# EAGLE board SmoothieBrainz - next round (EAGLE 6.4), part 1 of 2
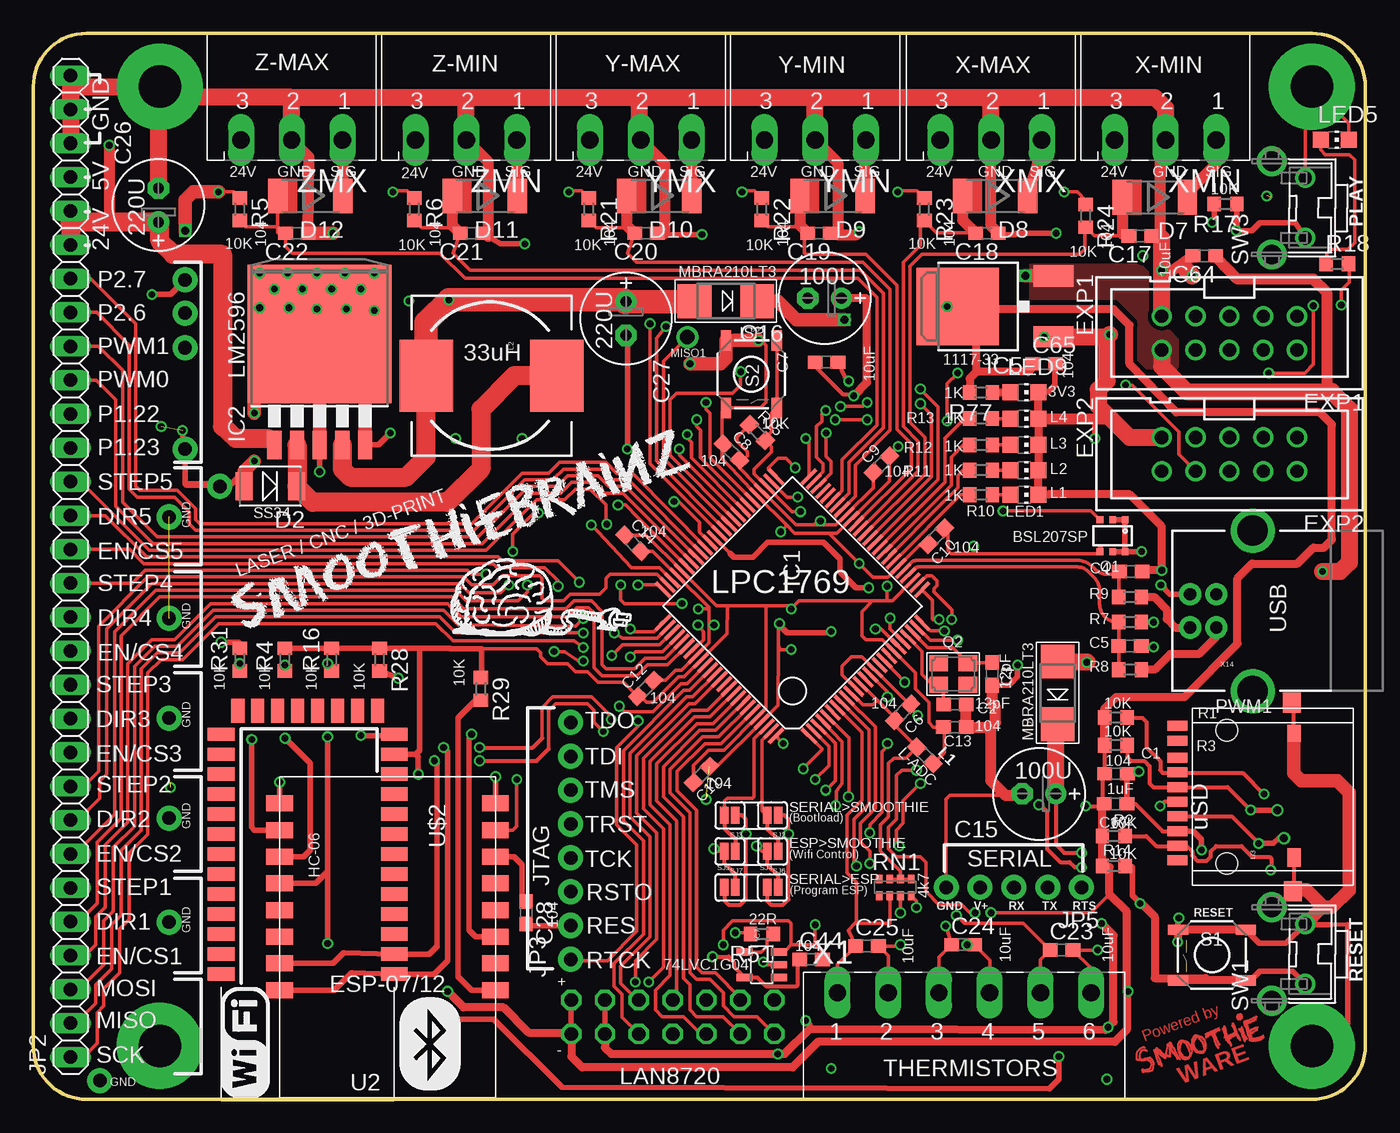
[diagram p0: board, top side]
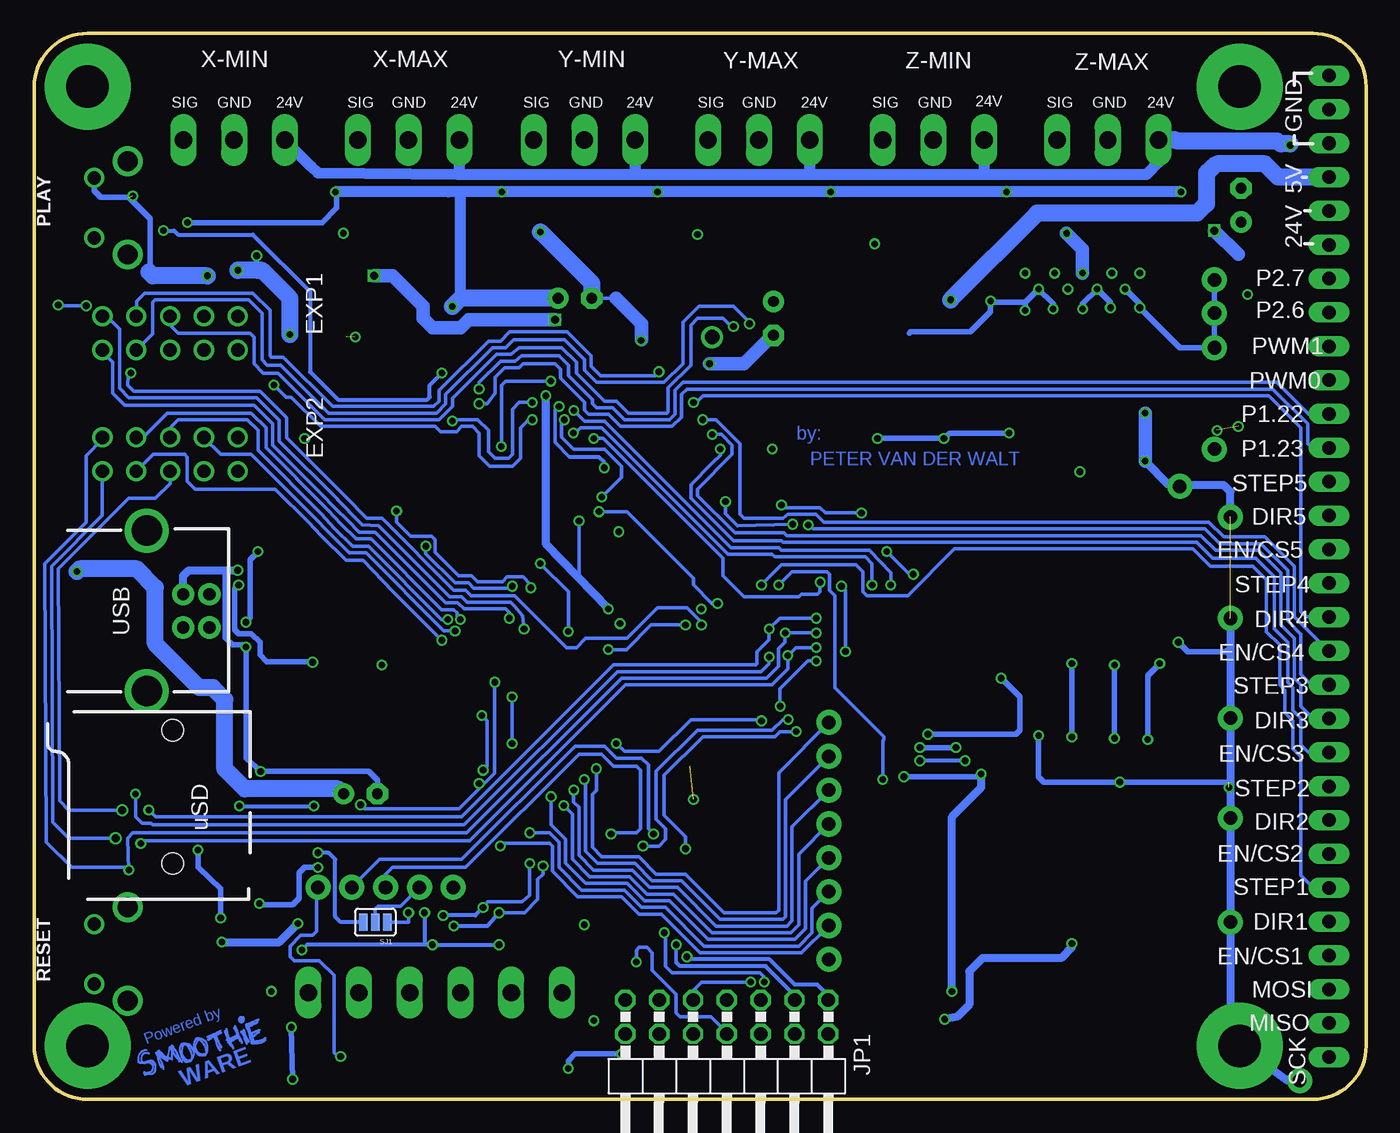
[diagram p1: board, bottom side, seen from below]

Size 100 x 80 mm. Coordinates in mm from the lower left corner, seen from the top.
Outline: 4,0 96,0 arc90 100,4 100,76 arc90 96,80 4,80 arc90 0,76 0,4 arc90 4,0
Copper layers (1*16): Top 0.035mm / dielectric 1.5mm / Bottom 0.035mm
Design rules "dirt_cheap_dirty_boards.v1": minimum track width 5mil, minimum drill 12mil, track to track 5mil, track to pad 5mil, pad to pad 5mil, via to via 5mil, smd to smd 0mil, copper to edge 10mil, drill to drill 10mil, minimum pad ring 10mil, minimum via ring 6mil, stop-mask expansion 2mil, vias tented up to drill 25mil, thermal gap 10mil
Net classes: 1 power: width 0.6 mm, clearance 0.305 mm
tRestrict: area 12.9,0.3 to 35.1,7.5
bRestrict: area 12.9,0.3 to 35.1,7.5

## Footprints (pad centres in the part's own frame; a part is rotated, then mirrored left to right if it is on the bottom)
C0603 = smd 1.1 x 1: 1 -0.85,0; 2 0.85,0
E2,5-7 = drill 0.813 pad 1.6: + -1.27,0 | drill 0.813 pad 1.6 octagon: - 1.27,0
SMADIODE = smd 2.54 x 2.54: A 2.349,0; C -2.349,0
DO-214AC = smd 1.27 x 2.1: 1 -1.98,0; 2 1.98,0
SOD87 = smd 1.45 x 2.6: 1 -2.445,0; 2 2.445,0
PAK100/2500-10 = drill 1 pad 1.422: 1 -5.08,-1.27; 2 -5.08,1.27; 3 -2.54,-1.27; 4 -2.54,1.27; 5 0,-1.27; 6 0,1.27; 7 2.54,-1.27; 8 2.54,1.27; 9 5.08,-1.27; 10 5.08,1.27
LQFP100 = smd 0.27 x 1.5: 1 -6,-7.75; 2 -5.5,-7.75; 3 -5,-7.75; 4 -4.5,-7.75; 5 -4,-7.75; 6 -3.5,-7.75; 7 -3,-7.75; 8 -2.5,-7.75; 9 -2,-7.75; 10 -1.5,-7.75; 11 -1,-7.75; 12 -0.5,-7.75; 13 0,-7.75; 14 0.5,-7.75; 15 1,-7.75; 16 1.5,-7.75; 17 2,-7.75; 18 2.5,-7.75; 19 3,-7.75; 20 3.5,-7.75; 21 4,-7.75; 22 4.5,-7.75; 23 5,-7.75; 24 5.5,-7.75; 25 6,-7.75; 51 6,7.75; 52 5.5,7.75; 53 5,7.75; 54 4.5,7.75; 55 4,7.75; 56 3.5,7.75; 57 3,7.75; 58 2.5,7.75; 59 2,7.75; 60 1.5,7.75; 61 1,7.75; 62 0.5,7.75; 63 0,7.75; 64 -0.5,7.75; 65 -1,7.75; 66 -1.5,7.75; 67 -2,7.75; 68 -2.5,7.75; 69 -3,7.75; 70 -3.5,7.75; 71 -4,7.75; 72 -4.5,7.75; 73 -5,7.75; 74 -5.5,7.75; 75 -6,7.75 | smd 1.5 x 0.27: 26 7.75,-6; 27 7.75,-5.5; 28 7.75,-5; 29 7.75,-4.5; 30 7.75,-4; 31 7.75,-3.5; 32 7.75,-3; 33 7.75,-2.5; 34 7.75,-2; 35 7.75,-1.5; 36 7.75,-1; 37 7.75,-0.5; 38 7.75,0; 39 7.75,0.5; 40 7.75,1; 41 7.75,1.5; 42 7.75,2; 43 7.75,2.5; 44 7.75,3; 45 7.75,3.5; 46 7.75,4; 47 7.75,4.5; 48 7.75,5; 49 7.75,5.5; 50 7.75,6; 76 -7.75,6; 77 -7.75,5.5; 78 -7.75,5; 79 -7.75,4.5; 80 -7.75,4; 81 -7.75,3.5; 82 -7.75,3; 83 -7.75,2.5; 84 -7.75,2; 85 -7.75,1.5; 86 -7.75,1; 87 -7.75,0.5; 88 -7.75,0; 89 -7.75,-0.5; 90 -7.75,-1; 91 -7.75,-1.5; 92 -7.75,-2; 93 -7.75,-2.5; 94 -7.75,-3; 95 -7.75,-3.5; 96 -7.75,-4; 97 -7.75,-4.5; 98 -7.75,-5; 99 -7.75,-5.5; 100 -7.75,-6
TO263-5 = smd 1.067 x 2.159: 1 -3.404,-5.791; 2 -1.702,-5.791; 3 0,-5.791; 4 1.702,-5.791; 5 3.404,-5.791 | smd 10.8 x 10.41: 6 0,2.54
DPACK = smd 1.6 x 3: 1 -2.28,-4.8; 3 2.28,-4.8 | smd 5.8 x 6.2: 4 0,2.38
SOT23-5 = smd 0.55 x 1.2: 1 -0.95,-1.3; 2 0,-1.3; 3 0.95,-1.3; 4 0.95,1.3; 5 -0.95,1.3
2X07/90 = drill 1.016 octagon: 1 -7.62,-6.35; 2 -7.62,-3.81; 3 -5.08,-6.35; 4 -5.08,-3.81; 5 -2.54,-6.35; 6 -2.54,-3.81; 7 0,-6.35; 8 0,-3.81; 9 2.54,-6.35; 10 2.54,-3.81; 11 5.08,-6.35; 12 5.08,-3.81; 13 7.62,-6.35; 14 7.62,-3.81
1X30 = drill 1.016 long: 1 -36.83,0; 2 -34.29,0; 3 -31.75,0; 4 -29.21,0; 5 -26.67,0; 6 -24.13,0; 7 -21.59,0; 8 -19.05,0; 9 -16.51,0; 10 -13.97,0; 11 -11.43,0; 12 -8.89,0; 13 -6.35,0; 14 -3.81,0; 15 -1.27,0; 16 1.27,0; 17 3.81,0; 18 6.35,0; 19 8.89,0; 20 11.43,0; 21 13.97,0; 22 16.51,0; 23 19.05,0; 24 21.59,0; 25 24.13,0; 26 26.67,0; 27 29.21,0; 28 31.75,0; 29 34.29,0; 30 36.83,0
1X08_NO_SILK = drill 1.016 pad 1.88: 1 0,0; 2 2.54,0; 3 5.08,0; 4 7.62,0; 5 10.16,0; 6 12.7,0; 7 15.24,0; 8 17.78,0
1X05_NO_SILK = drill 1.016 pad 1.88: 1 0,0; 2 2.54,0; 3 5.08,0; 4 7.62,0; 5 10.16,0
1X01NS-KIT = drill 1.016 pad 1.88: 1 0,0
0603 = smd 1.1 x 1: 1 -0.85,0; 2 0.85,0
CDRH125 = smd 5.4 x 4: 1 0,4.9; 2 0,-4.9
CHIP-LED0805 = smd 1.2 x 1.2: A 0,-1.05; C 0,1.05
SC74_INFINEON = smd 0.5 x 0.5: 1 -0.95,-1.2; 2 0,-1.2; 3 0.95,-1.2; 4 0.95,1.2; 5 0,1.2; 6 -0.95,1.2
CRYSTAL_3.2X2.5 = smd 1.4 x 1.2: 1 -1.1,-0.8; 2 1.1,0.8; GND1 -1.1,0.8; GND2 1.1,-0.8
R0603 = smd 1 x 1.1: 1 -0.85,0; 2 0.85,0
0603-ARV = smd 0.5 x 0.65: 1 -1.2,-0.625; 2 -0.4,-0.625; 3 0.4,-0.625; 4 1.2,-0.625; 5 1.2,0.625; 6 0.4,0.625; 7 -0.4,0.625; 8 -1.2,0.625
TACTILE_SWITCH_SMD = smd 1.524 x 0.762: 1 -2.54,1.905; 2 2.54,1.905; 3 -2.54,-1.905; 4 2.54,-1.905
SJ_3 = smd 0.635 x 1.27: 1 -0.889,0; 2 0,0; 3 0.889,0
SJ_2S = smd 0.635 x 1.27: 1 -0.412,0; 2 0.412,0
SW_TACT_STANDARD_RIGHT_ANGLE = drill 1: 1 -2.25,0; 2 2.25,0 | drill 1.5: 3 -3.5,2.5; 4 3.5,2.5
BLUETOOTH_SMD = smd 2 x 1: 1 0,0; 2 0,-1.5; 3 0,-3; 4 0,-4.5; 5 0,-6; 6 0,-7.5; 7 0,-9; 8 0,-10.5; 9 0,-12; 10 0,-13.5; 11 0,-15; 12 0,-16.5; 13 0,-18; 22 13,-18; 23 13,-16.5; 24 13,-15; 25 13,-13.5; 26 13,-12; 27 13,-10.5; 28 13,-9; 29 13,-7.5; 30 13,-6; 31 13,-4.5; 32 13,-3; 33 13,-1.5; 34 13,0 | smd 1 x 1.8: 14 1.25,-19.75; 15 2.75,-19.75; 16 4.25,-19.75; 17 5.75,-19.75; 18 7.25,-19.75; 19 8.75,-19.75; 20 10.25,-19.75; 21 11.75,-19.75
USD-SOCKET-PP = smd 0.75 x 1.5: 1 2.925,1.125; 2 1.825,1.125; 3 0.725,1.125; 4 -0.375,1.125; 5 -1.475,1.125; 6 -2.575,1.125; 7 -3.675,1.125; 8 -4.775,1.125; CD1 5.325,1.125; CD2 4.225,1.125 | smd 1.4 x 1: CDNC1 -4.55,-7.65 | smd 1.3 x 1: CDNC2 4.775,-7.65 | smd 1.5 x 1.35: GND1 -7.075,-7.55; GND2 7.075,-7.5 | hole 1.6: -5,-2.6; 5,-2.6
ESP8266-ESP12 = smd 2 x 1.2: 1 16.2,2; 2 16.2,4; 3 16.2,6; 4 16.2,8; 5 16.2,10; 6 16.2,12; 7 16.2,14; 8 16.2,16; 9 0,16; 10 0,14; 11 0,12; 12 0,10; 13 0,8; 14 0,6; 15 0,4; 16 0,2
MC1.5/6-G-3.81 = drill 1.3 long: 1 -9.525,8; 2 -5.715,8; 3 -1.905,8; 4 1.905,8; 5 5.715,8; 6 9.525,8
USB-B-PTH = drill 0.914 pad 1.676: D+ 0,1.25; D- 1.981,1.25; GND 0,-1.25; VBUS 1.981,-1.25 | drill 2.286: S1 -2.718,-6.02; S2 -2.718,6.02
MC1.5/3-G-3.81 = drill 1.3 long: 1 -3.81,8; 2 0,8; 3 3.81,8

## Placement (x,y rotation side)
C1  .1uF  [C0603]  81.29,24.43 180 top
C2  12pF  [C0603]  69.19,29.63 0 top
C3  12pF  [C0603]  71.99,31.92 270 top
C4  18pF  [C0603]  82.39,39.61 180 top
C5  18pF  [C0603]  82.34,34.02 180 top
C6  .1uF  [C0603]  65.28,29.04 45 top
C7  10uF  [C0603]  59.56,55.31 0 top
C8  .1uF  [C0603]  52.41,48.57 315 top
C9  .1uF  [C0603]  63.67,47.67 225 top
C10  .1uF  [C0603]  67.81,42.25 45 top
C11  .1uF  [C0603]  50.17,24.38 225 top
C12  .1uF  [C0603]  45.98,30.83 225 top
C13  .1uF  [C0603]  69.18,27.93 180 top
C14  .1uF  [C0603]  45.01,41.74 135 top
C15  [E2,5-7]  75.5,22.92 180 top
C16  [E2,5-7]  59.41,60.12 180 top
C17  104  [C0603]  83.1,64.8 180 top
C18  104  [C0603]  71.6,65 180 top
C19  104  [C0603]  59,65 180 top
C20  104  [C0603]  46,65 180 top
C21  104  [C0603]  32.9,65 180 top
C22  104  [C0603]  19.8,65 180 top
C23  10uF  [C0603]  77.2,11.2 0 top
C24  10uF  [C0603]  69.8,11.6 0 top
C25  10uF  [C0603]  62.6,11.5 0 top
C26  220u  [E2,5-7]  9.4,67.1 90 top
C27  220u  [E2,5-7]  44.5,58.6 270 top
C28  .1uF  [C0603]  37,14 270 top
C44  .1uF  [C0603]  58.4,10.5 0 top
C64  10uF  [C0603]  87.9,63.3 180 top
C65  .1uF  [C0603]  75.9,55.2 0 top
C67  1uF  [C0603]  81.25,22.18 180 top
D1  MBRA210LT3  [SMADIODE]  76.9,30.5 90 top
D2  [DO-214AC]  17.8,46 180 top
D3  MBRA210LT3  [SMADIODE]  52,59.9 180 top
D7  [SOD87]  84.2,67.7 180 top
D8  [SOD87]  72.2,67.8 180 top
D9  [SOD87]  60,67.8 180 top
D10  [SOD87]  47,67.8 180 top
D11  [SOD87]  33.9,67.8 180 top
D12  [SOD87]  20.8,67.8 180 top
EXP1  2510-  [PAK100/2500-10]  89.8,57.5 180 top
EXP2  2510-  [PAK100/2500-10]  89.8,48.4 180 top
IC1  LPC1769  [LQFP100]  57,37 45 top
IC2  [TO263-5]  21.5,54.9 0 top
IC5  LD117ADT33TR  [DPACK]  71.78,59.51 90 top
IC7  [SOT23-5]  54.7,10.1 90 top
JP1  [2X07/90]  48,1.1 180 bottom
JP2  [1X30]  2.8,40 90 top
JP3  [1X08_NO_SILK]  40.34,10.5 90 top
JP5  [1X05_NO_SILK]  78.7,15.9 180 top
JP6  [1X01NS-KIT]  11.4,61.5 0 top
JP7  [1X01NS-KIT]  11.4,59 0 top
JP8  [1X01NS-KIT]  11.4,56.4 0 top
JP9  [1X01NS-KIT]  10.2,36.1 0 top
JP10  [1X01NS-KIT]  10.2,13.3 0 top
JP11  [1X01NS-KIT]  10.2,21.1 0 top
JP12  [1X01NS-KIT]  10.2,28.6 0 top
JP13  [1X01NS-KIT]  5,1.4 0 top
JP14  [1X01NS-KIT]  10.2,43.7 0 top
JP15  [1X01NS-KIT]  11.4,48.8 0 top
JP16  [1X01NS-KIT]  14,46 0 top
L1  [0603]  66.94,25.81 315 top
L2  33uH  [CDRH125]  34.4,54.3 270 top
LED1  [CHIP-LED0805]  74.39,45.37 270 top
LED2  [CHIP-LED0805]  74.39,47.21 270 top
LED3  [CHIP-LED0805]  74.39,49.12 270 top
LED4  [CHIP-LED0805]  74.39,51.08 270 top
LED5  [CHIP-LED0805]  97.7,72 270 top
LED9  [CHIP-LED0805]  74.4,53.05 270 top
Q1  BSL207SP  [SC74_INFINEON]  81.02,42.3 180 top
Q2  12MHz  [CRYSTAL_3.2X2.5]  69.06,31.92 180 top
R1  10K  [R0603]  81.27,28.65 180 top
R2  10K  [R0603]  81.11,19.75 180 top
R3  10K  [R0603]  81.27,26.57 180 top
R4  1K  [R0603]  18.9,33 90 top
R5  10k  [R0603]  15.5,66.8 270 top
R6  10k  [R0603]  28.6,66.8 270 top
R7  1.5K  [R0603]  82.34,35.81 0 top
R8  33R  [R0603]  82.34,32.24 180 top
R9  33R  [R0603]  82.34,37.7 180 top
R10  1k  [R0603]  71.15,45.37 180 top
R11  1k  [R0603]  71.15,47.21 180 top
R12  1k  [R0603]  71.15,49.12 180 top
R13  1k  [R0603]  71.15,51.08 180 top
R14  10K  [R0603]  81.11,17.5 180 top
R15  10K  [R0603]  54.37,50.03 135 top
R16  1K  [R0603]  22.4,33 90 top
R17  10K  [R0603]  89.5,67.2 180 top
R18  1k  [R0603]  97.9,62.7 0 top
R21  10k  [R0603]  41.7,66.8 270 top
R22  10k  [R0603]  54.7,66.8 270 top
R23  10k  [R0603]  66.9,66.8 270 top
R24  10k  [R0603]  79,66.3 270 top
R28  1K  [R0603]  26,33 270 top
R29  1K  [R0603]  33.6,30.8 270 top
R31  1K  [R0603]  15.5,33 90 top
R51  22R  [R0603]  54.7,12.4 180 top
R77  1k  [R0603]  71.15,53.05 180 top
RN1  4.7K  [0603-ARV]  64.7,15.9 180 top
S1  [TACTILE_SWITCH_SMD]  88.49,10.82 180 top
S2  [TACTILE_SWITCH_SMD]  53.91,54.41 270 top
SJ1  [SJ_3]  74.39,13.29 180 bottom
SJ2  SOLDERJUMPERNC  [SJ_2S]  55.5,21.3 180 top
SJ3  SOLDERJUMPERNC  [SJ_2S]  52.3,21.3 180 top
SJ4  SOLDERJUMPERNC  [SJ_2S]  55.5,15.9 0 top
SJ5  SOLDERJUMPERNC  [SJ_2S]  52.3,15.9 0 top
SJ6  SOLDERJUMPERNC  [SJ_2S]  55.5,18.6 180 top
SJ7  SOLDERJUMPERNC  [SJ_2S]  52.3,18.6 180 top
SW1  SW_TACT_4P_B  [SW_TACT_STANDARD_RIGHT_ANGLE]  95.5,10.9 90 top
SW3  SW_TACT_4P_B  [SW_TACT_STANDARD_RIGHT_ANGLE]  95.5,66.9 90 top
U2  HC_05  [BLUETOOTH_SMD]  27.1,9.4 180 top
U3  USD-SOCKETUSD  [USD-SOCKET-PP]  87,22.7 90 top
U$2  ESP8266_ESP-12  [ESP8266-ESP12]  34.7,24.2 180 top
X1  [MC1.5/6-G-3.81]  69.9,0 0 top
X14  USBPTH  [USB-B-PTH]  88.82,36.66 180 top
XMN  [MC1.5/3-G-3.81]  85,80 180 top
XMX  [MC1.5/3-G-3.81]  71.9,80 180 top
YMN  [MC1.5/3-G-3.81]  58.7,80 180 top
YMX  [MC1.5/3-G-3.81]  45.6,80 180 top
ZMN  [MC1.5/3-G-3.81]  32.5,80 180 top
ZMX  [MC1.5/3-G-3.81]  19.4,80 180 top

## Library data of the parts
C1 C7 C17-C25 C28 C44 C64 C65 C67 R1-R3 R7-R15 R17 R18 R51 R77 = resistor
C2-C6 C8-C16 C26 C27 = rcl
D1 D3 IC1 IC7 Q2 = microbuilder
D2 SW1 SW3 = dp_devices
D7-D12 = semicon-smd-ipc
EXP1 EXP2 = con-3m; MF: 3M; MPN: 2510-6002UB; OC_FARNELL: 9838244; OC_NEWARK: 46F4725
IC2 = linear
IC5 = v-reg
JP1 JP2 = pinhead
JP3 = SparkFun-Connectors; PROD_ID: CONN-08438
JP5-JP16 = SparkFun-Connectors
L1 S1 S2 SJ1 X14 = SparkFun
L2 = SparkFun-Passives
LED1-LED5 LED9 = led
Q1 = transistor-fet
R4-R6 R16 R21-R24 R28 R29 R31 = adafruit
RN1 = resistor-dil; OC_FARNELL: unknown; OC_NEWARK: unknown
SJ2-SJ7 = SparkFun-Retired
U2 = SerialPortBluetooth
U3 = SparkFun-Connectors_PETERMICROSDEBAY
U$2 = ESP8266-ESP12
X1 XMN XMX YMN YMX ZMN ZMX = jt-con-phoenix-3.81

## Nets
2: R4.1 U$2.3
3.3V: C1.2 C7.1 C8.2 C9.2 C10.2 C11.2 C12.2 C13.2 C14.2 C16.+ C44.1 C65.1 C67.2 IC1.19 IC1.28 IC1.42 IC1.54 IC1.71 IC1.84 IC1.96 IC5.4 IC7.5 JP1.1 JP1.2 L1.2 Q1.4 R1.2 R2.2 R3.2 R4.2 R5.1 R6.1 R14.2 R15.2 R16.2 R17.2 R21.1 R22.1 R23.1 R24.1 R28.1 R29.1 R77.2 SJ1.1 U2.12 U3.4 U$2.16
4: U$2.6
5: U$2.5
5V: C15.+ C64.1 D1.C D3.C EXP1.10 IC5.3 SJ1.3
5VREG: C27.+ D3.A IC2.4 JP2.27 L2.2
12: C28.1 U$2.14
14: U$2.13
15: R31.1 U$2.2
16: U$2.12
24V: C26.+ IC2.1 JP2.25 JP2.26 XMN.3 XMX.3 YMN.3 YMX.3 ZMN.3 ZMX.3
ADC: U$2.10
AGND: C6.2 C23.2 C24.2 C25.2 IC1.11 IC1.15 X1.2 X1.4 X1.6
AVCC: C6.1 IC1.10 IC1.12 L1.1 RN1.1 RN1.2 RN1.3
BUZZER-RRD: EXP1.1 IC1.20
DIR1: IC1.80 JP2.5
DIR2: IC1.49 JP2.8
DIR3: IC1.58 JP2.11
DIR4: IC1.56 JP2.14
DIR5: IC1.50 JP2.17
EN1: IC1.81 JP2.4
EN2: IC1.48 JP2.7
EN3: IC1.59 JP2.10
EN4: IC1.57 JP2.13
EN5: IC1.85 JP2.16
ENET_CRS: IC1.92 JP1.7
ENET_MDC: IC1.87 JP1.5
ENET_MDIO: IC1.86 JP1.6
ENET_REF_CLK: IC1.88 R51.2
ENET_RX_ER: IC1.89
ENET_RXD0: IC1.91 JP1.10
ENET_RXD1: IC1.90 JP1.9
ENET_TX_EN: IC1.93 JP1.12
ENET_TXD0: IC1.95 JP1.11
ENET_TXD1: IC1.94 JP1.14
ESPRX: SJ5.2 SJ7.2 U2.2 U$2.7
ESPTX: SJ4.2 SJ6.2 U2.1 U$2.8
GND: C1.1 C2.2 C3.2 C4.1 C5.1 C7.2 C8.1 C9.1 C10.1 C11.1 C12.1 C13.1 C14.1 C15.- C16.- C17.1 C18.1 C19.1 C20.1 C21.1 C22.1 C26.- C27.- C44.2 C64.2 C65.2 C67.1 D2.2 EXP1.9 EXP2.9 IC1.31 IC1.41 IC1.55 IC1.72 IC1.83 IC1.97 IC2.3 IC2.5 IC2.6 IC5.1 IC7.3 JP1.3 JP1.4 JP2.28 JP2.29 JP2.30 JP5.5 JP6.1 JP7.1 JP8.1 JP9.1 JP10.1 JP11.1 JP12.1 JP13.1 JP14.1 JP15.1 JP16.1 LED1.C LED2.C LED3.C LED4.C LED5.C LED9.C R31.2 S1.3 S1.4 S2.3 S2.4 SW1.2 SW3.2 U2.13 U3.6 U3.CDNC1 U3.CDNC2 U3.GND1 U3.GND2 U$2.1 X14.GND XMN.2 XMX.2 YMN.2 YMX.2 ZMN.2 ZMX.2
ISP_BOOT: IC1.53 R15.1 S2.1 S2.2 U$2.15
JTAG-RTCK: IC1.100 JP3.1
JTAG-TCK: IC1.5 JP3.4
JTAG-TDI: IC1.2 JP3.7
JTAG-TDO: IC1.1 JP3.8
JTAG-TMS: IC1.3 JP3.6
JTAG-TRST: IC1.4 JP3.5
LED1: IC1.32 R10.2
LED2: IC1.33 R11.2
LED3: IC1.34 R12.2
LED4: IC1.35 R13.2
MISO1: IC1.61
MOSI1: EXP1.3 IC1.60
N$1: C2.1 IC1.22 Q2.2
N$2: C3.1 IC1.23 Q2.1
N$3: LED5.A R18.1
N$6: D7.1 XMN.1
N$8: D8.1 XMX.1
N$9: D2.1 IC2.2 L2.1
N$10: D9.1 YMN.1
N$12: D10.1 YMX.1
N$15: D11.1 ZMN.1
N$16: D12.1 ZMX.1
N$18: R28.2 U$2.11
N$23: JP5.4 SJ1.2
N$51: Q1.1 Q1.2 Q1.5 Q1.6 R7.2
N$61: R8.1 X14.D+
N$62: R9.1 X14.D-
N$77: IC7.2 JP1.8
N$78: IC7.4 R51.1
N$80: LED9.A R77.1
N$84: LED4.A R13.1
N$85: LED3.A R12.1
N$86: LED2.A R11.1
N$87: LED1.A R10.1
P1_22-3RD-SMALL-FET: IC1.36 JP2.20
P1_23-3RD-LARGE-FET: IC1.37 JP2.19
P1_30_CLICK-ON-RRD: EXP1.2 IC1.21
P2.6_FAN_FET: IC1.67 JP2.23
P2.7_HOTEND_FET: IC1.66 JP2.24
P2.9: IC1.64 Q1.3
PLAY: IC1.51 R17.1 SW3.1
PLAY_LED: IC1.82 R18.2
POT_SCL: IC1.47
POT_SDA: IC1.46
PWM0_PSU_OUT: IC1.69 JP2.21
PWM1_BED_HEATER: IC1.68 JP2.22
RESET: C28.2 IC1.17 JP3.2 R14.1 S1.1 S1.2 SW1.1
RESET1: R29.2 U$2.9
RSTOUT: IC1.14 JP3.3
RTS: JP5.1 R16.1 U$2.4
RX_0: IC1.99 SJ2.2 SJ6.1
RX_FT: JP5.3 SJ2.1 SJ4.1
SCK1: EXP1.5 IC1.62
SD-CD-ON-RRD: EXP2.7 IC1.25
SD-CS-ON-RRD: EXP2.4 IC1.24
SD_CD/KILL-ON-RRD: EXP2.8 IC1.52
SD_CS: IC1.79 R1.1 U3.2
SD_IRQ-ENC-A-ON-RRD: EXP2.5 IC1.27
SD_MISO: EXP2.1 IC1.77 JP2.2 R2.1 U3.7
SD_MOSI: EXP2.6 IC1.76 JP2.3 R3.1 U3.3
SD_SCK: EXP2.2 IC1.78 JP2.1 U3.5
SD_WP-ENC-B-ON-RRD: EXP2.3 IC1.26
SSEL1: EXP1.4 IC1.63
STP1: IC1.75 JP2.6
STP2: IC1.74 JP2.9
STP3: IC1.73 JP2.12
STP4: IC1.70 JP2.15
STP5: IC1.65 JP2.18
TH1_HOTEND: C23.1 IC1.9 RN1.8 X1.5
TH2_BED: C24.1 IC1.8 RN1.7 X1.3
TH3: C25.1 IC1.7 RN1.6 X1.1
TH4: IC1.6
TX_0: IC1.98 SJ3.2 SJ7.1
TX_FT: JP5.2 SJ3.1 SJ5.1
USB_D+: C5.2 IC1.29 R7.1 R8.2
USB_D-: C4.2 IC1.30 R9.2
VUSB: D1.A X14.VBUS
X_MAX: C18.2 D8.2 IC1.39 R23.2
X_MIN: C17.2 D7.2 IC1.38 R24.2
Y_MAX: C20.2 D10.2 IC1.43 R21.2
Y_MIN: C19.2 D9.2 IC1.40 R22.2
Z_MAX: C22.2 D12.2 IC1.45 R5.2
Z_MIN: C21.2 D11.2 IC1.44 R6.2